# Altium PCB PCB1.PcbDoc
Units mil, origin at the board's own origin, x right, y up, seen from the top; angles counter-clockwise.
Board outline 2278.75 x 1266 mil, 2 copper layers (Top Layer, Bottom Layer); 22 components, 23 nets, 85 pads, 147 vias.
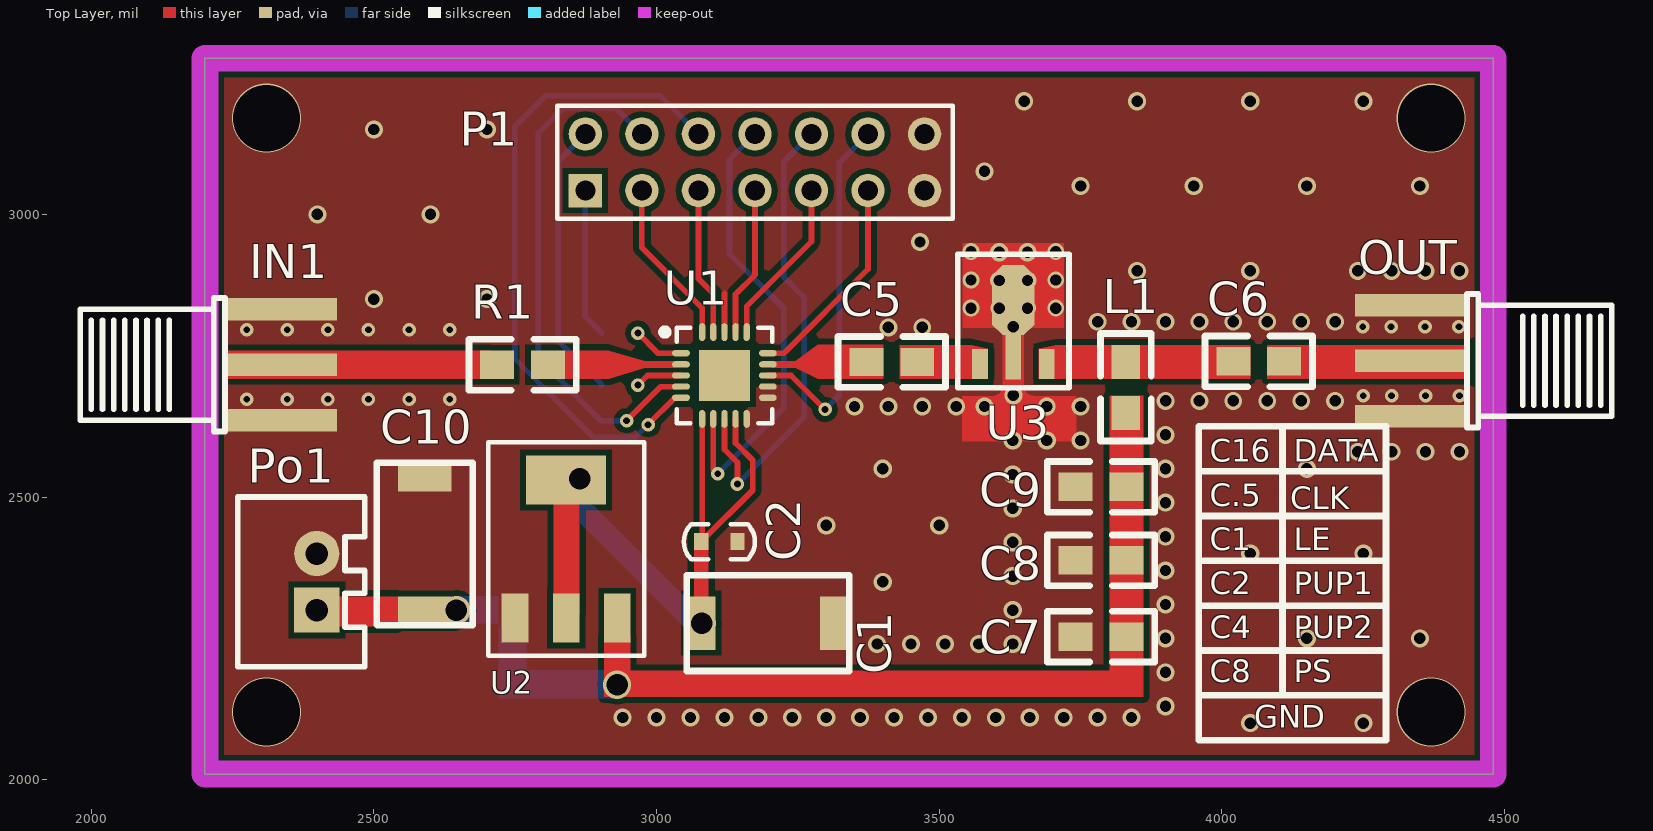
[diagram p0: Top Layer view]
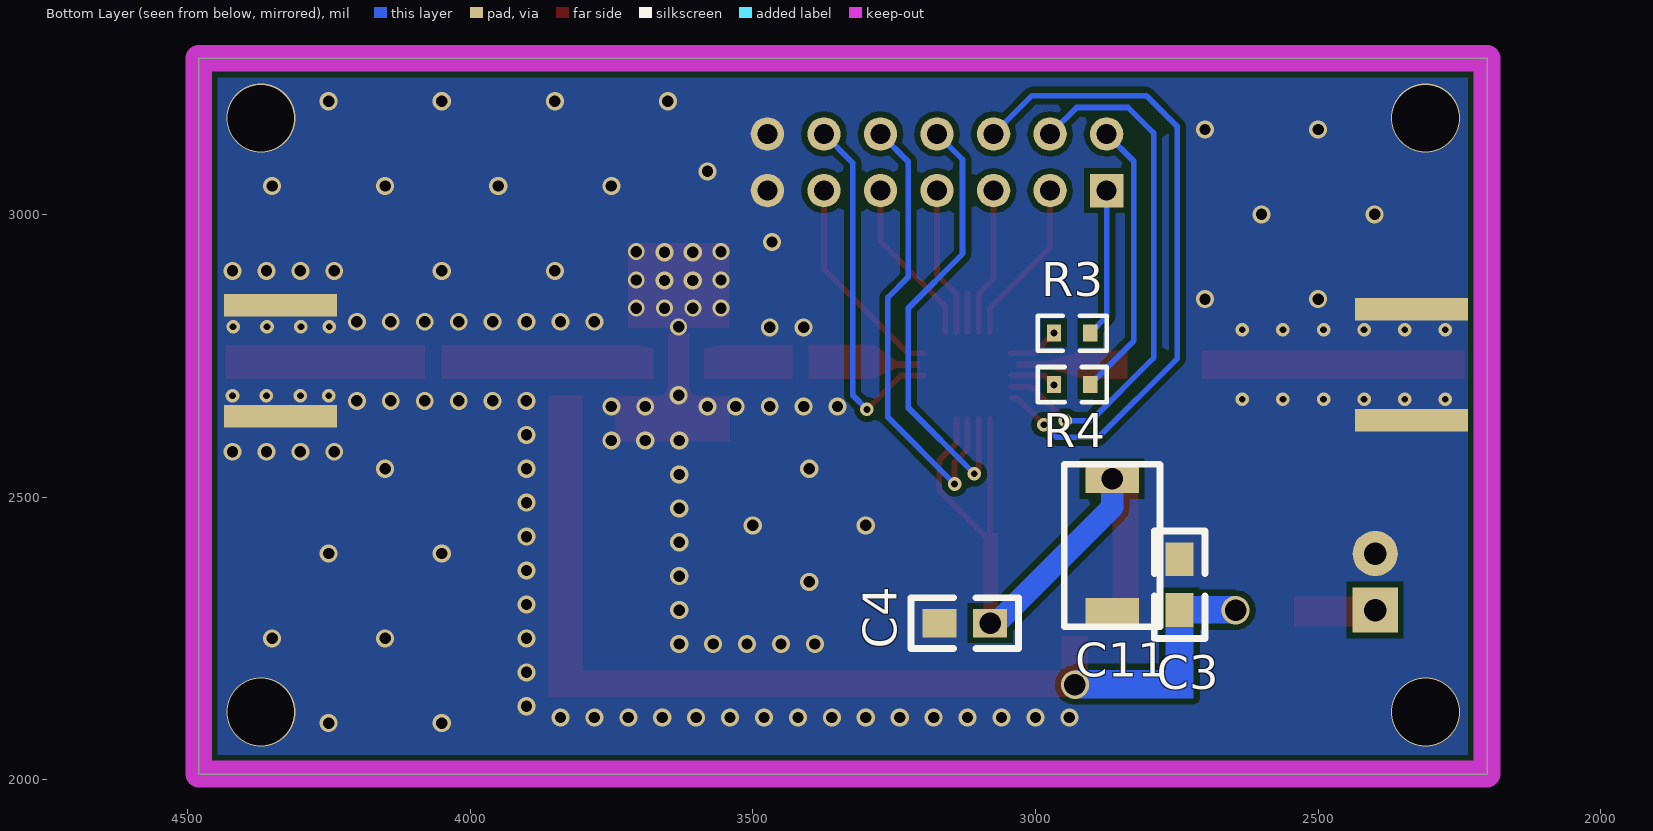
[diagram p1: Bottom Layer view, seen from below]

## Layer stack, top to bottom
Top Solder: solder mask 0.4, Solder Resist, Dk 3.5
Top Layer: signal copper 1.4
Dielectric 1: dielectric 12.6, FR-4, Dk 4.8
Bottom Layer: signal copper 1.4
Bottom Solder: solder mask 0.4, Solder Resist, Dk 3.5

## Board outline
2201.25,2010 4480,2010 4480,3276 2201.25,3276

## Design rules (kind name [scope] priority, off if disabled: settings)
Clearance [All] p1: gap=10
PlaneConnect [All] p1: planeconnectstyle=Direct reliefexpansion=20 reliefentries=4 reliefconductorwidth=10 reliefairgap=10
PolygonConnect [All] p1: connectstyle=Direct reliefconductorwidth=10 reliefentries=4 polygonreliefangle="90 Angle" airgapwidth=10
RoutingVias [All] p1: holewidth=28 width=50 viastyle="Through Hole" minholewidth=28 minwidth=50 maxholewidth=28 maxwidth=50
SolderMaskExpansion [All] p1: expansion=4
Width [All] p1: maxlimit=40 minlimit=10 preferedwidth=10
29 further rules are at their usual default settings.

## Components (designator, comment, footprint, x,y, rotation, side; value= is the part's Value field where it differs from the comment)
C1 "4.7uf" "7343-31 TYPE D" 3053.19,2192.35 r0 top
C2 "0.1uf" 0603C 3143,2421 r180 top
C3 "0.1uf" 0805 2745,2390 r270 bottom
C4 "0.1uf" 0805 3170,2277 r180 bottom
C5 "68pf" 0805 3461,2739 r180 top
C6 "68pf" 0805 4110,2740 r180 top
C7 "1UF" 0805 3831,2253 r180 top
C8 "1200pf" 0805 3831,2388 r180 top
C9 "68pf" 0805 3831,2518 r180 top
C10 "4.7UF" "7343-31 TYPE D" 2674.65,2273.19 r90 top
C11 "4.7UF" "7343-31 TYPE D" 2949,2558 r270 bottom
IN1 "差分输出" SMA-LYING 2276,2730 r0 top
L1 "82nh" 0805 3830,2739 r270 top
OUT "差分输出" SMA-LYING 4394,2745 r180 top
P1 "Header 7X2" HDR2X7 2874,3042 r0 top
Po1 "Power_2Port" Power_S_2Port 2399,2300 r90 top
R1 "50" 0805 2718,2734 r0 top
R3 "10k" 0603R 2935,2790 r180 bottom
R4 "10k" 0603R 2935,2699 r0 bottom
U1 "PE4302" LC-QFN-20_4x4x05P 3120,2715 r270 top
U2 "AMS1117-3.0V" SOT223 2749.45,2285.91 r0 top
U3 "SBB5089" SOT-89 3531.95,2935.39 r0 top

## Footprints (in the part's own frame and the unit in brackets; to place one, negate y for a bottom-side part, rotate by r counter-clockwise, add the part's x,y. Pads: shape width x height; smd on the part's side, far side on the other; paste and mask are expansions set on the pad)
0603C [mil]
  rect 25x30 smd: 1(0,0) 2(64,0)
  silkscreen extent -31,-31 95,31
0603R [mil]
  rect 25x30 smd: 1(-32,0) 2(32,0)
  silkscreen extent -61,-31 61,31
0805 [mil]
  rect 60x50 smd: 1(0,0) 2(90,0)
  silkscreen extent -50,-45 140,45
"7343-31 TYPE D" [mm]
  rect 1.3x2.4 smd: 1(0.65,2.15) 2(6.65,2.15)
  silkscreen extent 0,0 7.3,4.3
HDR2X7 [mm] "Connector; Header; 7x2 Position"
  rect 1.5x1.5 hole 0.9: 1(0,0)
  round 1.5 hole 0.9: 2(0,2.54) 3(2.54,0) 4(2.54,2.54) 5(5.08,0) 6(5.08,2.54) 7(7.62,0) 8(7.62,2.54) 9(10.16,0) 10(10.16,2.54) 11(12.7,0) 12(12.7,2.54) 13(15.24,0) 14(15.24,2.54)
  silkscreen extent -1.27,-1.27 16.51,3.81
LC-QFN-20_4x4x05P [mm]
  rect 2.3x2.3 smd mask+0.051: 0(0,0)
  oval 0.28x0.8 smd mask+0.051: 1(-1,-1.95) 2(-0.5,-1.95) 3(0,-1.95) 4(0.5,-1.95) 5(1,-1.95) 11(1,1.95) 12(0.5,1.95) 13(0,1.95) 14(-0.5,1.95) 15(-1,1.95)
  oval 0.8x0.28 smd mask+0.051: 6(1.95,-1) 7(1.95,-0.5) 8(1.95,0) 9(1.95,0.5) 10(1.95,1) 16(-1.95,1) 17(-1.95,0.5) 18(-1.95,0) 19(-1.95,-0.5) 20(-1.95,-1)
  silkscreen extent -2.15,-2.82 2.15,2.15
Power_S_2Port [mil]
  rect 80x80 hole 40: 1(0,0)
  round 80 hole 40: 2(100,0)
  silkscreen extent -100,-85 200,140
SMA-LYING [mm]
  rect 5.08x1.016 smd: 0(1.5,0.1) 1(1.5,-2.4) 1(1.5,2.6)
  rect 5.08x1.016 smd far side: 1(1.5,-2.4) 1(1.5,2.6)
  silkscreen extent -7.5,-2.9 -1,3.1
SOT223 [mm]
  rect 1.2x2.2 smd: 1(0,0) 2(2.3,0) 3(4.6,0)
  rect 3.6x2.2 smd: 4(2.3,6.2)
  silkscreen extent -1.2,-1.7 5.8,7.9
SOT-89 [mm]
  rect 0.7x1.35 smd: 1(1.016,-5.08) 3(4.016,-5.08)
  rect 0.7x1.99 smd: 2(2.516,-4.785)
  oct 1.9x3.15 smd: 2(2.516,-2.215)
  silkscreen extent 0.02,-6.15 5.02,-0.15

## Part data
C1 C10 C11: library part "Tantalium Cap"
C2 C3 C4 C5 C6 C7 C8 C9: library part Cap
IN1 OUT: library part SMA
L1: library part Inductor
P1: "Header, 7-Pin, Dual row"
R1 R3 R4: library part Res

## Via types
v1: diameter 32, hole 20, Top Layer to Bottom Layer, 72 vias
v2: diameter 31.5, hole 20.08, Top Layer to Bottom Layer, 31 vias
v3: diameter 24, hole 12, Top Layer to Bottom Layer, 27 vias
v4: diameter 30, hole 20, Top Layer to Bottom Layer, 9 vias
v5: diameter 122.05, hole 118.11, Top Layer to Bottom Layer, 4 vias
v6: diameter 50, hole 38, Top Layer to Bottom Layer, 4 vias

## Nets (pads, with @x,y where several pads share a name; then routed paths per layer and width w, separated by ;. In a path a pad name is that pad's centre, name@x,y a point inside that pad or via, vN(x,y) a via of type N, cw(c..) or ccw(c..) an arc to the next point about the centre after c; other vN are vias at no path point)
3.0V: C1.1 C2.2 C4.2 C11.1 U1.6 U1.9 U2.2 U2.4 | length 834.3
  Top Layer w10: C2.2 C2.2@3080.63,2422.63 ; U1.6 C2.2@3080.63,2422.63 ; U1.9 3139.69,2595.31 3170,2565 3170,2512 C2.2@3080.63,2422.63
  Bottom Layer w40: v6(2864.35,2532.41) 2864.35,2481.65 3069,2277 v6(3080,2277)
5V: C3.2 C7.1 C8.1 C9.1 C10.1 L1.2 Po1.1 U2.3
  other v6: 2930,2168 2646,2300
C1: P1.5 U1.19 | length 261.1
  Top Layer w10: P1.5 3074,2886 3100.32,2859.68 U1.19
C2: P1.7 U1.17 | length 264.4
  Top Layer w10: U1.17 3139.69,2858.69 3174,2893 P1.7
C4: P1.9 U1.16 | length 297.6
  Top Layer w10: U1.16 3159.37,2837.37 ; 3159.69,2837.37 3159.69,2837.69 3274,2952 P1.9
C8: P1.11 U1.15 | length 377.8
  Top Layer w10: U1.15 3225.37,2754.37 3374,2903 P1.11
C16: R3.1 U1.1 | length 91
  Top Layer w10: v3(2967,2790) 3002.63,2754.37 U1.1
C.5: P1.3 U1.20 | length 294.4
  Top Layer w10: P1.3 2974,2941 3080.63,2834.37 U1.20
CLK: P1.4 U1.4 | length 942.3
  Top Layer w10: v3(2947,2635) 3007.31,2695.31 U1.4
  Bottom Layer w10: v3(2947,2635) 2902,2635 2791,2746 2791,3144 2836,3189 2927,3189 P1.4
DATA: R4.2 U1.3 | length 83.3
  Top Layer w10: v3(2967,2698) 2984,2715 U1.3
GND: C1.2 C2.1 C3.1 C4.1 C7.2 C8.2 C9.2 C10.2 C11.2 IN1.1 OUT.1 P1.13 P1.14 Po1.2 U1.10 U1.11 U1.12 U1.18 U2.1 U3.2 | length 68.9
  Top Layer w10: U1.18 3120,2860.63
  other v1: 4050,2100 4250,2100 2940,2110 3000,2110 3060,2110 3120,2110 3180,2110 3240,2110 3300,2110 3360,2110 3420,2110 3480,2110 3540,2110 3600,2110 3660,2110 3720,2110 3780,2110 3840,2110 3900,2130 3900,2190 3390,2240 3450,2240 3510,2240 3570,2240 3630,2240 3900,2250 4150,2250 4350,2250 3630,2300 3900,2310 3400,2350 3630,2360 3900,2370 4050,2400 4250,2400 3630,2420 3900,2430 3300,2450 3500,2450 3630,2480 3900,2490 3630,2540 3400,2550 3900,2550 4150,2550 3630,2600 3690,2600 3750,2600 3900,2610 3631,2680 2500,2850 2700,2850 3606,2883 3656,2883 3850,2900 4050,2900 3606,2933 3656,2933 3466,2951 2400,3000 2600,3000 3750,3050 3950,3050 4150,3050 4350,3050 3580,3076 2500,3150 2700,3150 3650,3200 3850,3200 4050,3200 4250,3200
  other v2: 4240,2580 4300,2580 4360,2580 4420,2580 3350,2660 3410,2660 3470,2660 3530,2660 3580,2660 3690,2660 3750,2660 3900.25,2670 3960,2670 4020,2670 4080,2670 4140,2670 4200,2670 3410,2800 3470,2800 3780,2810 3840,2810 3900,2810 3960,2810 4020,2810 4080,2810 4140,2810 4200,2810 4240,2900 4300,2900 4360,2900 4420,2900
  other v3: 2275,2673 2346.8,2673 2418.6,2673 2490.4,2673 2562.2,2673 2634,2673 4250,2679 4300,2679 4360,2679 4420,2679 2275,2796 2346.8,2796 2418.6,2796 2490.4,2796 2562.2,2796 2634,2796 4249,2801 4299,2801 4359,2801 4419,2801
  other v4: 3631,2801 3556,2834 3606,2834 3656,2834 3706,2834 3556,2884 3706,2884 3556,2934 3706,2934
  other v5: 2310,2120 4370,2120 2310,3170 4370,3170
LE: P1.6 U1.5 | length 1166.6
  Top Layer w10: v3(2985,2628) 3032.63,2675.63 U1.5
  Bottom Layer w10: v3(2985,2628) 2963,2606 2888,2606 2749,2745 2749,3155 2804,3210 3006,3210 P1.6
NetC5_1: C5.1 U3.1
NetC5_2: C5.2 U1.14
NetC6_1: C6.1 OUT.0
NetC6_2: C6.2 L1.1 U3.3
NetIN1_0: IN1.0 R1.1
NetP1_1: P1.1 R3.2 | length 264
  Bottom Layer w10: P1.1 2874,2819 R3.2
NetP1_2: P1.2 R4.1 | length 494.8
  Bottom Layer w10: P1.2 2826,3094 2826,2776 R4.1
NetR1_2: R1.2 U1.2
PS: P1.12 U1.13 | length 644.6
  Top Layer w10: U1.13 3238,2715 v3(3298,2655)
  Bottom Layer w10: v3(3298,2655) 3323,2680 3323,3091 P1.12
PUP1: P1.8 U1.7 | length 808.3
  Top Layer w10: U1.7 3100.32,2548.68 v3(3108,2541)
  Bottom Layer w10: v3(3108,2541) 3225,2658 3225,2834 3129,2930 3129,3097 P1.8
PUP2: P1.10 U1.8 | length 827.8
  Top Layer w10: U1.8 3120,2584 3143,2561 v3(3143,2523)
  Bottom Layer w10: v3(3143,2523) 3261,2641 3261,2853 3225,2889 3225,3093 P1.10
pads on no net: U1.0

## Polygon pours and split planes (outlines as drawn)
GND on Top Layer "Top Layer-No Net" (solid, pour order 0): 2201.25,3276 2201.25,2010 4480,2010 4480,3276
GND on Bottom Layer "Top Layer-No Net" (solid, pour order 2): 2201.25,3276 2201.25,2010 4480,2010 4480,3276

## Keep-outs
Keep-Out Layer:
  the board outline again, w47.24

## Other copper
Top Layer:
  rectangle net 5V: 2907,2146 3861,2193
  rectangle net 5V: 3801,2146 3861,2680
  rectangle net GND: 3540,2598 3743,2679
  rectangle net GND: 3612,2662 3650,2788
  rectangle net NetC6_1: 4080,2709 4432,2768.86
  rectangle net NetC6_2: 3705,2709 4050,2768.86
  rectangle net NetC5_1: 3430,2709 3558,2768.86
  rectangle net GND: 3541,2799 3721,2949
  rectangle net 3.0V: 3066,2288 3092,2436
  rectangle net 3.0V: 2818,2292 2864,2521
  rectangle net 5V: 2907,2167 2954,2254
  rectangle net 5V: 2417,2271 2543,2324
  rectangle net NetIN1_0: 2241,2709 2705,2759
  region net NetC6_2: 3705,2768.86 3676,2762 3676,2709 3705,2709
  region net NetC5_1: 3558,2768.86 3586,2762 3586,2709 3558,2709
  region net NetC5_2: 3401,2769 3401,2709 3285,2709 3245,2729 3244,2729 3205,2729 3205,2740 3245,2740 3285,2769
  region net NetR1_2: 2838,2759 2838,2709 2916,2709 2980,2729 2992,2729 3033,2729 3033,2740 2980,2740 2915,2759
  region net GND: 3650,2696 ccw(c3667,2696) 3667,2679 3650,2679
  region net GND: 3612,2696 cw(c3595,2696) 3595,2679 3612,2679
Bottom Layer:
  rectangle net 5V: 2720,2144 2930,2194
  rectangle net 5V: 2720,2144 2770,2270
  rectangle net 5V: 2646,2276 2720,2325

## Silkscreen, mask and mechanical layers (free items; w line width, h text height)
Top Overlay:
  lines w11.81: 3959,2307.86 4287,2307.86 ; 3959,2387.14 4290,2387.14 ; 3959,2545.71 4289,2545.71 ; 3960,2149.29 4290,2149.29 ; 3961,2228.57 4289,2228.57 ; 3962,2466.43 4290,2466.43 ; 4107,2149.29 4107,2625 ; 4290,2619 4290,2070 3959,2070 3959,2625 4290,2625
  text "C16" at 3978,2562 h40
  text "DATA" at 4127,2562 h40
  text "C.5" at 3978,2484 h40
  text "CLK" at 4121,2478 h40
  text "C1" at 3978,2406 h40
  text "LE" at 4127,2406 h40
  text "C2" at 3978,2328 h40
  text "PUP1" at 4127,2328 h40
  text "C4" at 3978,2250 h40
  text "PUP2" at 4127,2250 h40
  text "C8" at 3978,2172 h40
  text "PS" at 4127,2172 h40
  text "GND" at 4057,2092 h40